# Altium PCB GANDHVEDH_Ammonia.PcbDoc (part 1 of 2)
Units mil, origin at the board's own origin, x right, y up, seen from the top; angles counter-clockwise.
Board outline 3700.79 x 3700.79 mil, 2 copper layers (Top Layer, Bottom Layer); 98 components, 57 nets, 314 pads, 1596 vias.
Unrouted connection lines stored in the file: 13.
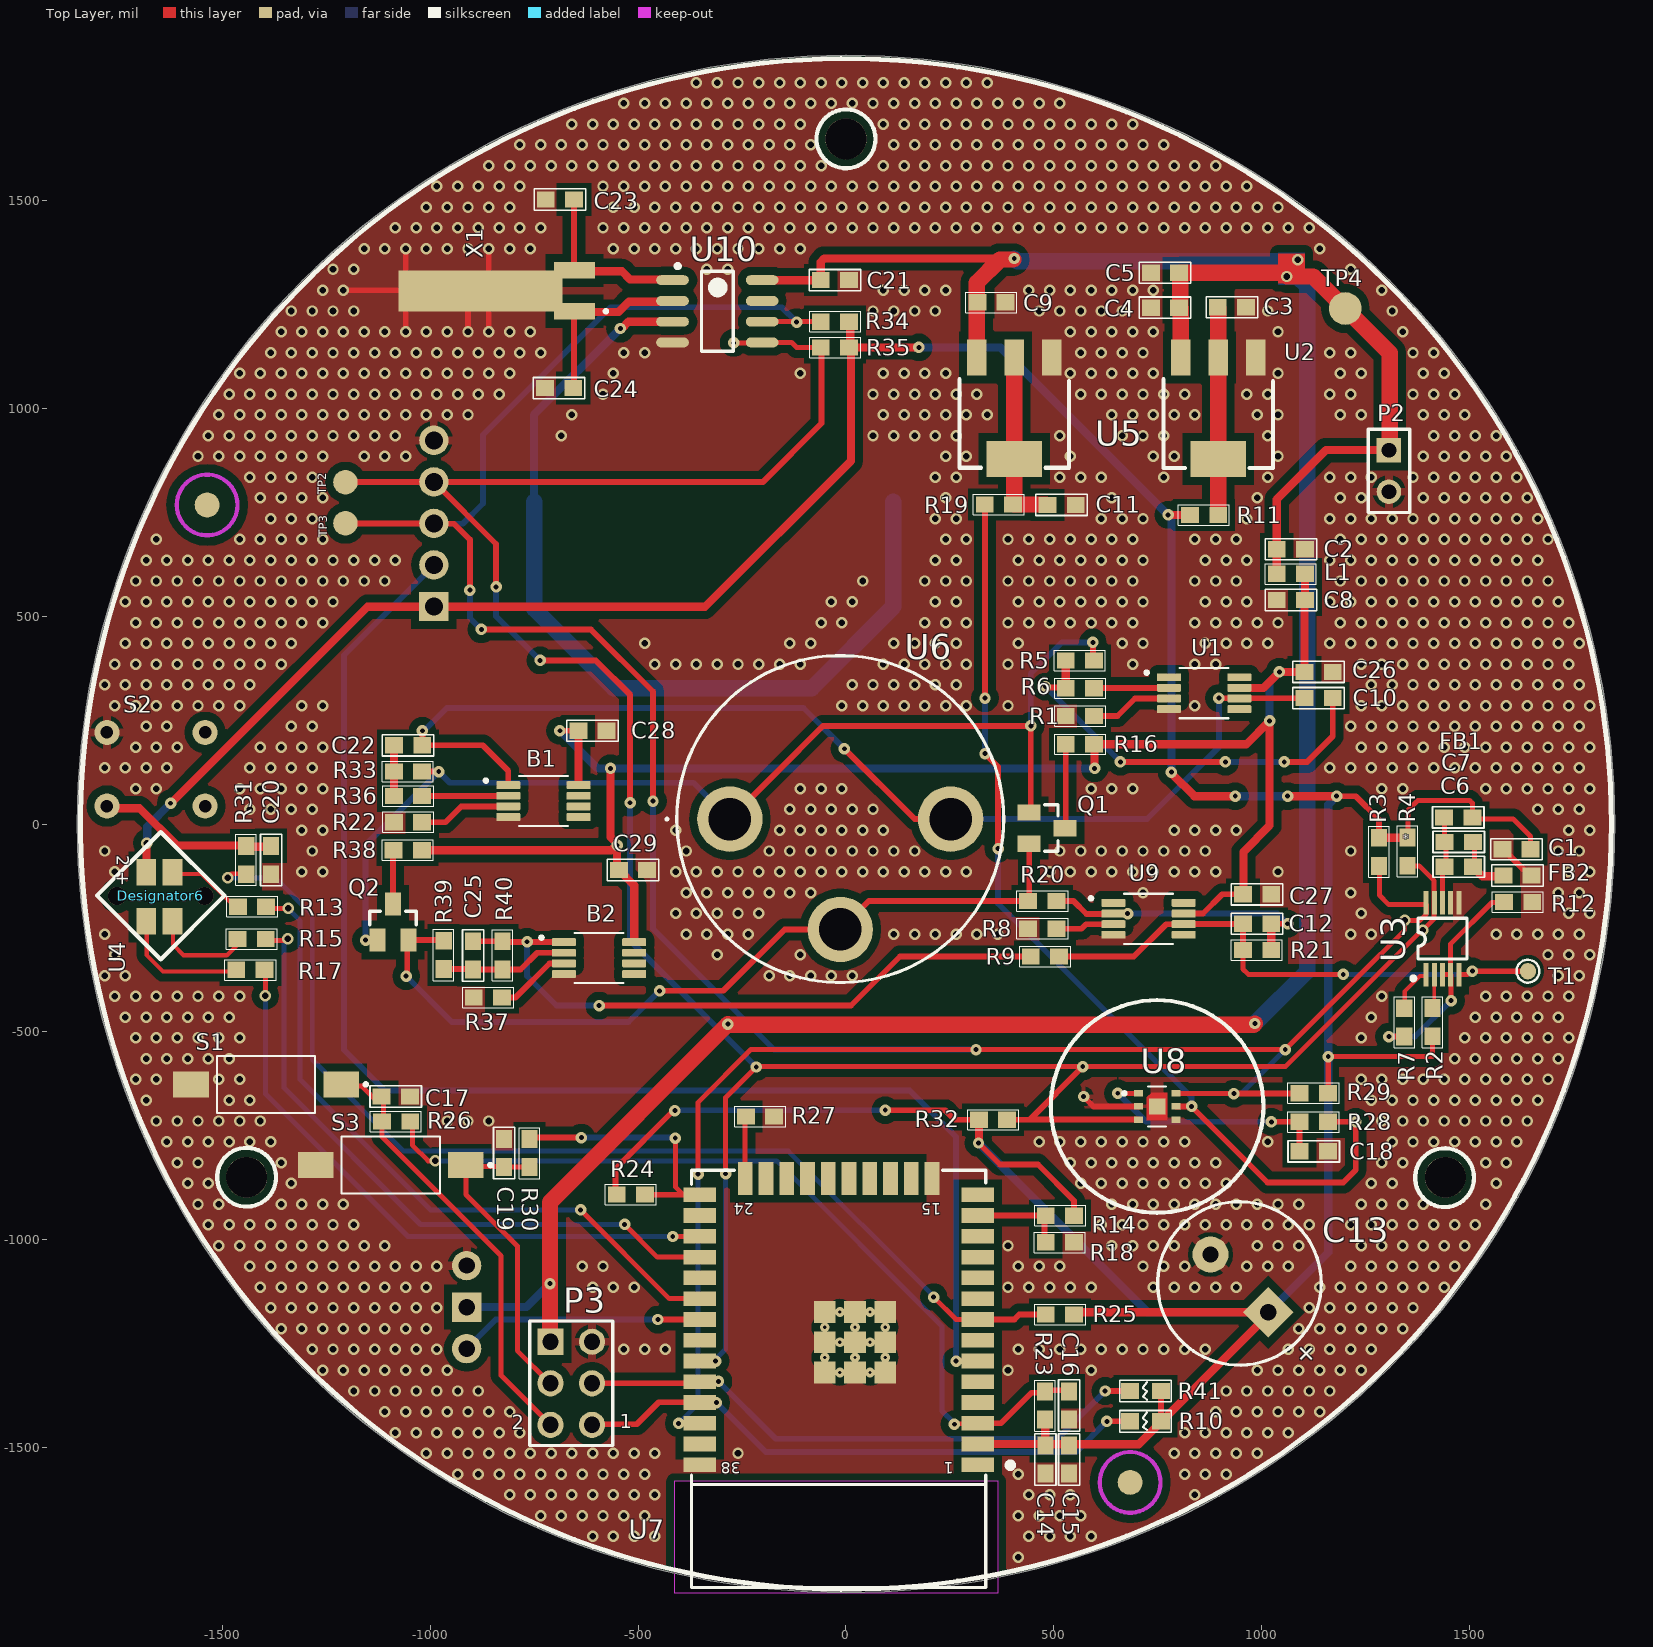
[diagram p0: Top Layer view]
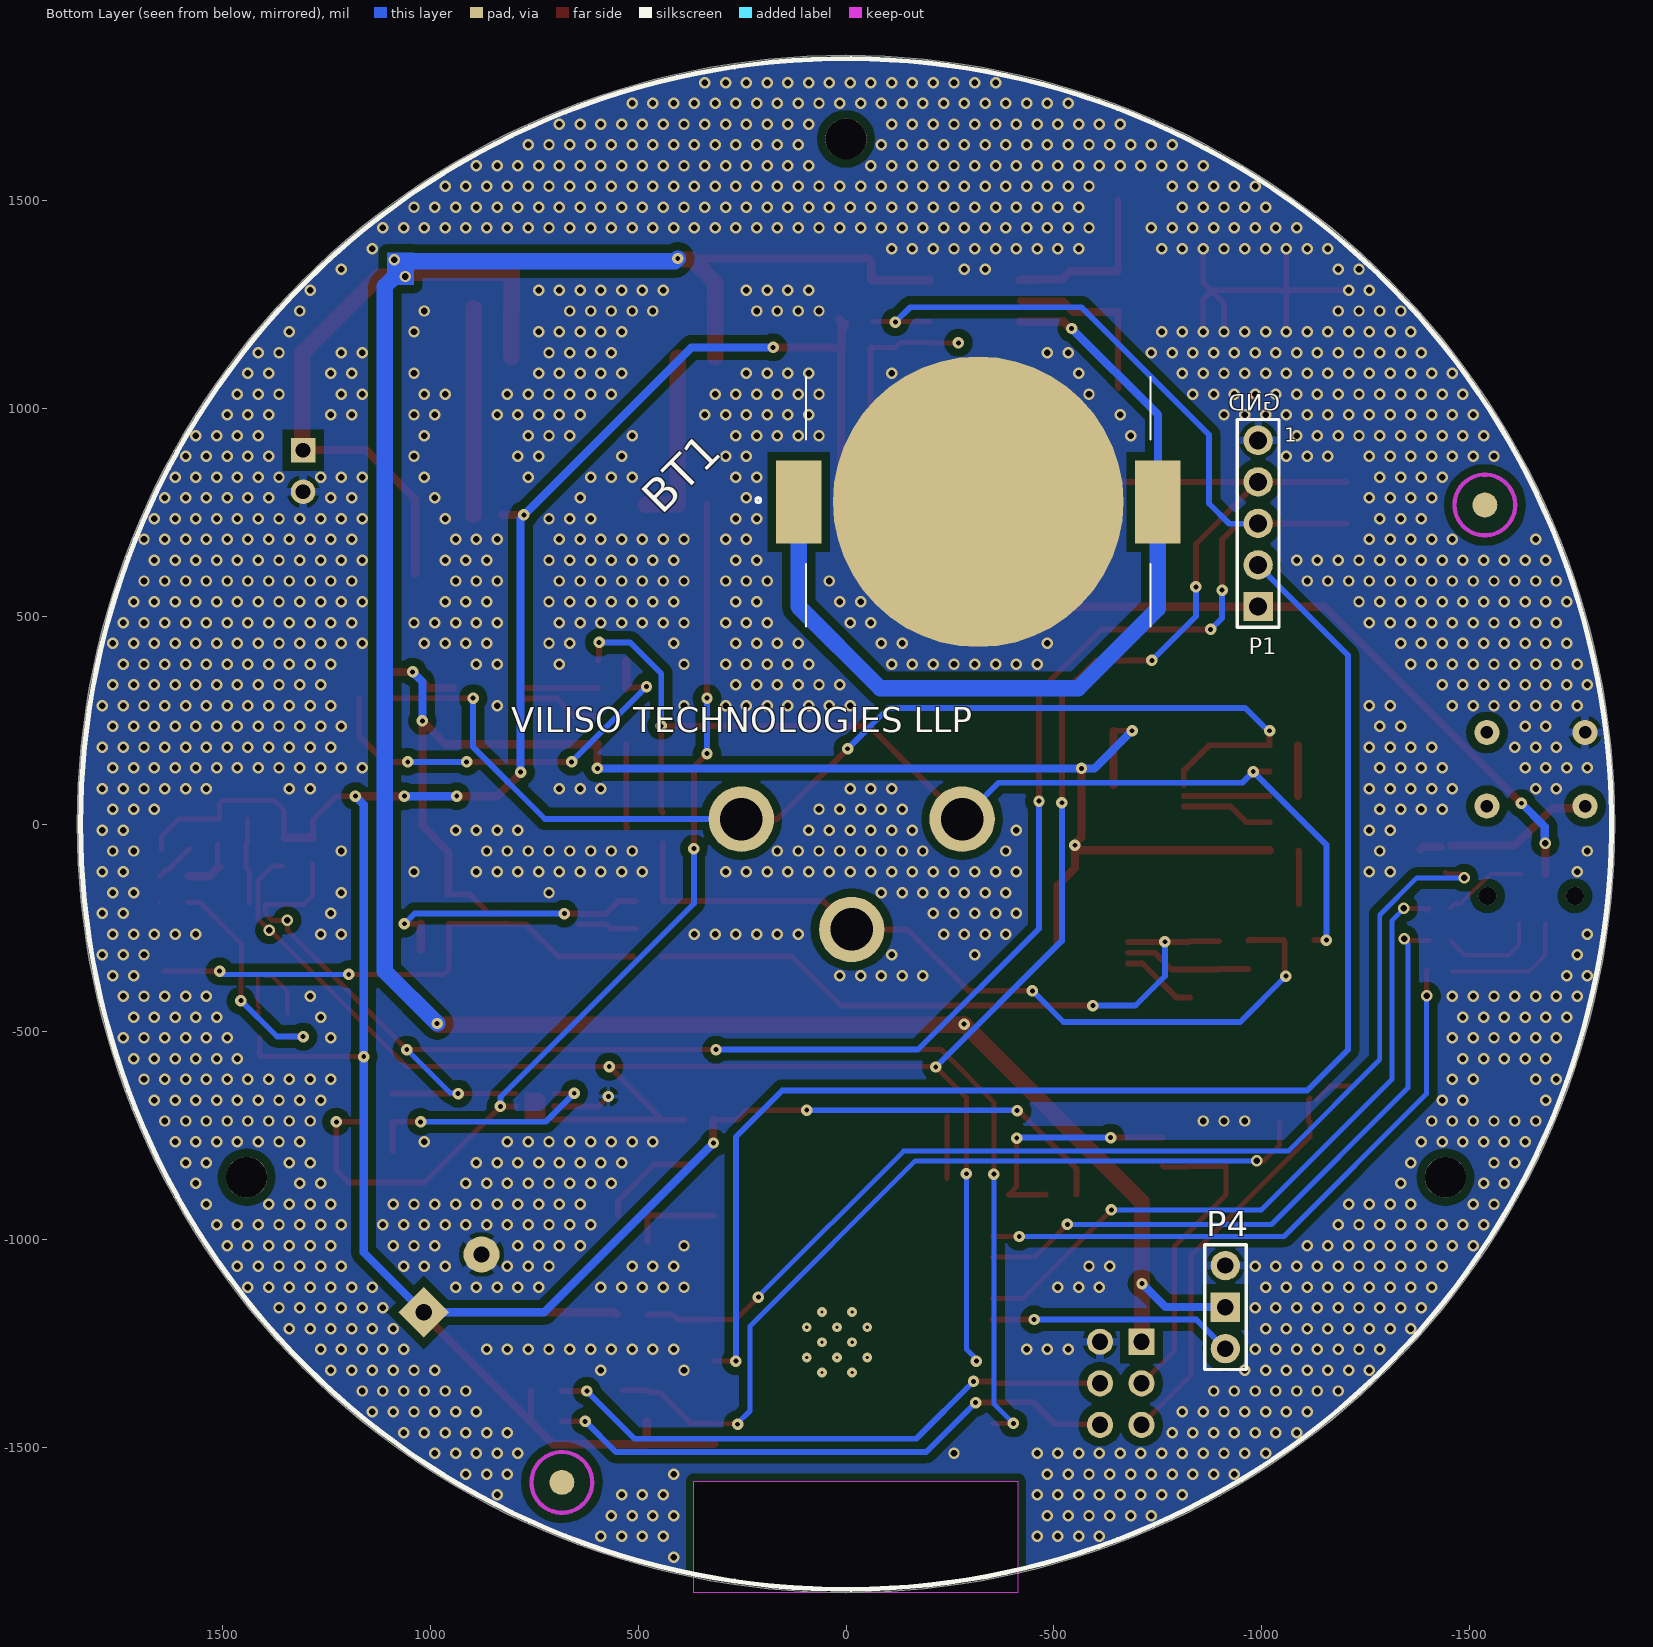
[diagram p1: Bottom Layer view, seen from below]

## Layer stack, top to bottom
Top Solder: solder mask 0.4, Solder Resist, Dk 3.5
Top Layer: signal copper 1.4
Dielectric 1: dielectric 12.6, FR-4, Dk 4.8
Bottom Layer: signal copper 1.4
Bottom Solder: solder mask 0.4, Solder Resist, Dk 3.5

## Board outline
-1850.39,0 ccw(c0,0) 0,-1850.39 ccw(c0,0) 1850.39,0 ccw(c0,0) 0,1850.39 ccw(c0,0)
cut-out: -413.39,-1582.68 -413.39,-1850.39 366.14,-1850.39 366.14,-1582.68

## Design rules (kind name [scope] priority, off if disabled: settings)
AssemblyTestpoint [All] p1: testpointundercomponent=FALSE minsize=40 maxsize=100 preferedsize=60 minholesize=0 maxholesize=40 preferedholesize=32.01 testpointgrid=0.98 usegrid=TRUE gridoriginx=2685 gridoriginy=2465 gridtolerance=0.01 allowsidetop=TRUE allowsidebottom=TRUE
BoardOutlineClearance [All] p1: gap=12 ignorepadtopadclearanceinfootprint=FALSE except(0: Arc-SplitContinuation Track-SplitContinuation SMDPad-SplitContinuation THPad-SplitContinuation Via-SplitContinuation Fill-SplitContinuation Poly-SplitContinuation Region-SplitContinuation Text-SplitContinuation)
Clearance Clearance_3 [InComponent('X2')] p1: gap=5.91 ignorepadtopadclearanceinfootprint=FALSE
Clearance Clearance_2 [InPolygon] p2: gap=19.68 ignorepadtopadclearanceinfootprint=FALSE
Clearance Clearance_1 [InComponent('U14')OR InComponent('U11')OR InComponent('U7')] p3: gap=3.94 ignorepadtopadclearanceinfootprint=FALSE
Clearance [All] p4: gap=3.94 ignorepadtopadclearanceinfootprint=FALSE
FabricationTestpoint [All] p1: side=3 testpointundercomponent=TRUE minsize=40 maxsize=100 preferedsize=60 minholesize=0 maxholesize=40 preferedholesize=32.01 testpointgrid=0.98 allowsidetop=TRUE allowsidebottom=TRUE usegrid=TRUE gridoriginx=2685 gridoriginy=2465 gridtolerance=0.01
HoleSize [All] p1: absolutevalues=TRUE maxlimit=100 minlimit=0.98 maxpercent=80.000 minpercent=20.000
LayerPairs [All] p1 off: enforce=TRUE
MinimumSolderMaskSliver [All] p1 off: minsoldermaskwidth=10
PolygonConnect [All] p1: thpad.connectstyle=Relief thpad.reliefconductorwidth=19.68 thpad.reliefentries=4 thpad.polygonreliefangle="90 Angle" thpad.airgapwidth=10 smdpad.connectstyle=Direct smdpad.reliefconductorwidth=10 smdpad.reliefentries=4 smdpad.polygonreliefangle="90 Angle" smdpad.airgapwidth=10 via.connectstyle=Relief via.reliefconductorwidth=10 via.reliefentries=4 via.polygonreliefangle="90 Angle" via.airgapwidth=10
RoutingVias [All] p1: holewidth=11.81 width=27.56 viastyle="Through Hole" minholewidth=3.94 minwidth=15.75 maxholewidth=11.81 maxwidth=27.56
SilkToSolderMaskClearance [IsPad] p1 off: minsilkscreentomaskgap=10 clearancetoexposedcopper=TRUE
SolderMaskExpansion [All] p1: expansion=4 istentingtop=FALSE
Width [All] p1: maxlimit=236.22 minlimit=7.87 preferedwidth=14
24 further rules are at their usual default settings.

## Components (designator, comment, footprint, x,y, rotation, side; value= is the part's Value field where it differs from the comment)
B1 "OPA2388IDGKT" SOP65P490X110-8N -728.35,55.12 r0 top
B2 "OPA2388IDGKT" SOP65P490X110-8N -594.49,-322.83 r0 top
BT1 "Battery" MPD_BK-912-TR -318.31,775.59 r180 bottom
C1 "1uf" C0603 1614.07,-60.9 r0 top
C2 "0.1µF" C0603 1070.87,661.42 r180 top
C3 "10uf" C0603 929.13,1244.09 r180 top
C4 "0.1uf" C0603 768,1243 r180 top
C5 "10uf" C0603 768,1327 r180 top
C6 "1uf" C0603 1475,-103 r0 top
C7 "10uf" C0603 1475,-43 r0 top
C8 "0.1µF" C0603 1070.87,539.37 r0 top
C9 "10µF" R0603 350.39,1255.91 r0 top
C10 "0.1uf" C0603 1137.8,303.15 r180 top
C11 "10µF" C0603 518.99,768.17 r0 top
C12 "0.1uf" C0603 989.62,-240.16 r180 top
C13 "470uf/16V" "C16, C49, C58" 947,-1106 r135 top
C14 "0.1uf" C0603 480,-1530 r90 top
C15 "0.1uf" C0603 537,-1530 r90 top
C16 "0.1uf" C0603 537,-1400 r90 top
C17 "1nF" C0603 -1084,-656 r180 top
C18 "0.1uf" C0603 1126.03,-788 r0 top
C19 "1nF" C0603 -823,-792 r270 top
C20 "1nF" C0603 -1384,-87 r90 top
C21 "1uf" C0603 -26.73,1309.29 r180 top
C22 "0.1uf" C0603 -1054.31,189.36 r0 top
C23 "0.1uf/DNP" C0603 -688.73,1503.29 r0 top
C24 "0.1uf/DNP" C0603 -690.73,1049.29 r0 top
C25 "0.1uf" C0603 -897.64,-316.37 r90 top
C26 "1uf" C0603 1137.8,366.14 r0 top
C27 "1uf" C0603 989.57,-169.29 r0 top
C28 "1uf" C0603 -610.24,224.41 r0 top
C29 "1uf" C0603 -512.81,-110.64 r0 top
Designator6 "light pipe" "PCBCOMPONENT_1 - DUPLICATE2" -1649.61,-173.23 r315 top
FB1 "FB 1uH" C0603 1474,16 r0 top
FB2 "FB 1uH" C0603 1616.5,-123.9 r0 top
L1 "1uH" "L3, L4, L5, L6, L7" 1070.87,602.36 r0 top
P1 "Header 5" J2 -992.13,723.62 r180 bottom
P2 "Header 2" HDR1X2 1307,900 r270 top
P3 "Header 3X2" "P5 - new" -661.42,-1346.46 r180 top
P4 "RGB LED Connector" P6 -913.39,-1162.99 r90 bottom
Q1 "MMBFJ176" SOT23 484.25,-9.84 r270 top
Q2 "MMBFJ176" SOT23 -1090.55,-236.22 r0 top
R1 "10K" R0603 562.99,259.84 r180 top
R2 "10K" R0603 1412,-477 r90 top
R3 "10K" R0603 1283,-67 r270 top
R4 "10K" R0603 1352,-66.41 r270 top
R5 "10K" R0603 562.99,393.7 r0 top
R6 "10K" R0603 562.99,326.77 r180 top
R7 "10K" R0603 1344,-477.41 r270 top
R8 "10E" R0603 472.44,-251.97 r180 top
R9 "0E" R0603 478.88,-318.9 r180 top
R10 "10K" R_0603_W 721,-1438 r180 top
R11 "0E" R0603 862.2,744.09 r0 top
R12 "0E" R0603 1618,-188 r0 top
R13 "1.69K" R0603 -1430,-199 r180 top
R14 "10K/ NTC/DNP" R0603 515,-943 r180 top
R15 "1.69K" R0603 -1431,-277 r180 top
R16 "1M" R0603 562.99,192.04 r180 top
R17 "1.69K" R0603 -1434,-351 r180 top
R18 "10K/DNP" R0603 515,-1007 r0 top
R19 "0E" R0603 367.99,769.17 r0 top
R20 "10E" R0603 472.44,-185.04 r180 top
R21 "10K" R0603 989.62,-303.15 r0 top
R22 "10K" R0603 -1054.31,4.32 r180 top
R23 "10K" R0603 479,-1400 r90 top
R24 "10K" R0603 -518,-892 r0 top
R25 "10K" R0603 515,-1181 r180 top
R26 "470E" R0603 -1083,-716 r0 top
R27 "10K" R0603 -207,-704 r180 top
R28 "0E" R0603 1126,-717 r0 top
R29 "10K" R0603 1126,-648 r0 top
R30 "470E" R0603 -762,-792 r90 top
R31 "470E" R0603 -1444,-87 r270 top
R32 "10K" R0603 354,-712 r180 top
R33 "10K" R0603 -1054.31,126.37 r0 top
R34 "10K/DNP" R0603 -26.73,1209.29 r180 top
R35 "10K/DNP" R0603 -26.73,1147.29 r180 top
R36 "10K" R0603 -1054.31,67.31 r180 top
R37 "10E" R0603 -862.2,-417.32 r180 top
R38 "1M" R0603 -1055.12,-62.99 r180 top
R39 "10E" R0603 -968.5,-314.96 r90 top
R40 "10K" R0603 -826.77,-316.39 r270 top
R41 "10K" R_0603_W 721,-1365 r180 top
S1 "SW-PB" *TE_FSMSM -1396,-627 r180 top locked
S2 "SW-DPST" "PCBComponent_1 - duplicate" -1661,131.76 r0 top locked
S3 "SW-PB" *TE_FSMSM -1096,-821 r180 top locked
T1 "TEST POINT" TP 1641.73,-354.33 r0 top
U1 "OPA380AIDGKT" SOP65P490X110-8N 862.2,314.96 r0 top
U2 "='Texas Instruments'PartNumber" "U1, U24              SOT-223" 896,1001.05 r180 top
U3 "ADS1115IDGSR-msop" "U19, U20" 1436,-276 r90 top locked
U4 "RGB_LED" WL-SFCW_1206 -1653,-175.25 r270 top
U5 "LM1117S-1.8" "U1, U24              SOT-223" 404.99,1001.17 r180 top
U6 "SGX-4NH3-100" SGX4NH3100 -279.53,11.81 r0 top
U7 "ESP_32" "U20             ESP 32" -17.76,-1198 r180 top locked
U8 "SGP30-D-R4" XCDR_SGP40-D-R4 749,-680 r0 top
U9 "OPA380AIDGKT" SOP65P490X110-8N 728.35,-228.35 r0 top
U10 "DS1307Z" "U14               SOIC-8N" -309.73,1234.29 r0 top
X1 "32.768kHz" XTAL_ECS-.327-12.5-13FLX-C -732.28,1283.46 r180 top

## Footprints (in the part's own frame and the unit in brackets; to place one, negate y for a bottom-side part, rotate by r counter-clockwise, add the part's x,y. Pads: shape width x height; smd on the part's side, far side on the other; paste and mask are expansions set on the pad)
*TE_FSMSM [mm]
  rect 2.19x1.6 smd: 1(-4.59,0) 2(4.59,0)
  silkscreen extent -6.2,-1.75 3,1.75, body extent -4.04,-1.78 3.96,1.82, height 2.4
"C16, C49, C58" [mm]
  rect 2.2x2.2 hole 1: 1(-2.5,0)
  round 2.2 hole 1: 2(2.5,0)
  silkscreen extent -5,-5 5,5
C0603 [mil]
  rect 43x39 smd: 1(-34.03,0) 2(34.03,0)
  silkscreen extent -62,-26 62,26, body extent -31,-16 31,16, height 12
HDR1X2 [mm] "Connector; Header; 2 Position"
  rect 1.5x1.5 hole 0.9: 1(0,0)
  round 1.5 hole 0.9: 2(2.54,0)
  silkscreen extent -1.27,-1.27 3.81,1.27
J2 [mm]
  round 1.8 hole 1.1: 1(0,5.08) 2(0,2.54) 3(0,0) 4(0,-2.54)
  rect 1.8x1.8 hole 1.1: 5(0,-5.08)
  silkscreen extent -1.27,-6.35 1.27,6.35, body extent -1.27,-6.35 1.27,6.35, height 9.07
"L3, L4, L5, L6, L7" [mil] "R0603"
  rect 43x39 smd: 1(-34,0) 2(34,0)
  silkscreen extent -61,-25 61,25, body extent -33,-16 33,16, height 22
MPD_BK-912-TR [mm]
  rect 2.79x5.08 smd: 1(-10.985,0) 1(10.985,0)
  round 17.78 smd: 2(0,0)
  silkscreen extent -13.59,-7.62 10.54,7.62, body extent -11.48,-7.67 11.38,7.74, height 4.3
"P5 - new" [mm]
  round 1.6 hole 1: 1(-1.27,2.54) 2(1.27,2.54) 3(-1.27,0) 4(1.27,0) 5(-1.27,-2.54)
  rect 1.6x1.6 hole 1: 6(1.27,-2.54)
  silkscreen extent -2.54,-3.81 2.54,3.81, body extent -2.54,-3.81 2.54,3.81, height 8.57
P6 [mm]
  round 1.8 hole 1: 1(-2.54,0) 3(2.54,0)
  rect 1.8x1.8 hole 1: 2(0,0)
  silkscreen extent -3.81,-1.27 3.81,1.27, body extent -3.78,-1.22 3.84,1.32, height 9.07
"PCBComponent_1 - duplicate" [mil]
  round 60 hole 30: 1(118.11,-88.58) 2(-118.11,-88.58) 3(118.11,88.58) 4(-118.11,88.58)
  body extent -150,-121 152,115, height 195
"PCBCOMPONENT_1 - DUPLICATE2" [mm]
  round 1.1 hole 1.1: 1(1.89,1.89) 2(-1.89,-1.89)
  silkscreen extent -2.77,-2.74 2.74,2.77
R0603 [mil] "R0603"
  rect 43x39 smd: 1(-34,0) 2(34,0)
  silkscreen extent -62,-25 61,25, body extent -33,-16 33,16, height 22
R_0603_W [mil] "Chip Resistor, 2-Leads, Body 1.60x0.80mm, IPC Medium Density"
  rect 43x39 smd: 1(-37,0) 2(37,0)
  silkscreen extent -62,-26 62,26, body extent -30,-15 32,16, height 18
SGX4NH3100 [mm]
  round 4 hole 2.6: 1(0,0) 2(6.75,-6.75) 3(13.5,0)
  silkscreen extent -3.9,-10 16.75,10
SOP65P490X110-8N [mm]
  rrect25% 1.47x0.48 smd: 1(-2.15,0.975) 2(-2.15,0.325) 3(-2.15,-0.325) 4(-2.15,-0.975) 5(2.15,-0.975) 6(2.15,-0.325) 7(2.15,0.325) 8(2.15,0.975)
  silkscreen extent -3.62,-1.54 1.5,1.54
SOT23 [mm]
  rect 1x1.4 smd: 1(-0.95,-1.1) 2(0.95,-1.1) 3(0,1.1)
  silkscreen extent -1.42,-0.15 1.42,0.66, body extent -1.45,-1.2 1.45,1.2, height 1.11
TP [mm]
  round 1 smd paste-1 mask+0.102: 1(0,0)
  silkscreen extent -0.7,-0.7 0.7,0.7
"U1, U24              SOT-223" [mm]
  rect 1.2x2.2 smd: 1(-2.3,-3.1) 2(0,-3.1) 3(2.3,-3.1)
  rect 3.4x2.2 smd: 4(0,3.1)
  silkscreen extent -3.35,-1.77 3.35,3.65, body extent -3.26,-3.47 3.24,3.49, height 1.9
"U14               SOIC-8N" [mm]
  oval 2x0.6 smd: 1(-2.74,1.905) 2(-2.74,0.635) 3(-2.74,-0.635) 4(-2.74,-1.905) 5(2.74,-1.905) 6(2.74,-0.635) 7(2.74,0.635) 8(2.74,1.905)
  silkscreen extent -2.55,-2.44 0.98,2.89, body extent -2.99,-2.45 3,2.45, height 1.7
"U19, U20" [mm]
  rect 1.45x0.3 smd mask+0.08: 1(-2.2,1) 2(-2.2,0.5) 3(-2.2,0) 4(-2.2,-0.5) 5(-2.2,-1) 6(2.2,-1) 7(2.2,-0.5) 8(2.2,0) 9(2.2,0.5) 10(2.2,1)
  silkscreen extent -2.55,-1.5 1.25,1.9
"U20             ESP 32" [mm]
  rect 2x0.9 smd: 1(-8.5,8.755) 2(-8.5,7.485) 3(-8.5,6.215) 4(-8.5,4.945) 5(-8.5,3.675) 6(-8.5,2.405) 7(-8.5,1.135) 8(-8.5,-0.135) 9(-8.5,-1.405) 10(-8.5,-2.675) 11(-8.5,-3.945) 12(-8.5,-5.215) 13(-8.5,-6.485) 14(-8.5,-7.755) 25(8.5,-7.755) 26(8.5,-6.485) 27(8.5,-5.215) 28(8.5,-3.945) 29(8.5,-2.675) 30(8.5,-1.405) 31(8.5,-0.135) 32(8.5,1.135) 33(8.5,2.405) 34(8.5,3.675) 35(8.5,4.945) 36(8.5,6.215) 37(8.5,7.485) 38(8.5,8.755)
  rect 0.9x2 smd: 15(-5.715,-8.755) 16(-4.445,-8.755) 17(-3.175,-8.755) 18(-1.905,-8.755) 19(-0.635,-8.755) 20(0.635,-8.755) 21(1.905,-8.755) 22(3.175,-8.755) 23(4.445,-8.755) 24(5.715,-8.755)
  rect 1.33x1.33 smd: 39(-2.85,3.115) 39(-2.85,-0.585) 39(-2.85,1.265) 39(-1,3.115) 39(-1,1.265) 39(-1,-0.585) 39(0.85,3.115) 39(0.85,1.265) 39(0.85,-0.585)
  silkscreen extent -10.6,-9.26 9,16.26, body extent -9.06,-9.29 9.01,16.25, height 3.2
WL-SFCW_1206 [mm] "SMT Full-color Chip LED Waterclear, body 3.2x1.6mm"
  rect 1.6x1.2 smd: 1(-1.5,0.8) 2(-1.5,-0.8) 3(1.5,-0.8) 4(1.5,0.8)
  body extent -1.6,-0.8 1.6,0.8, height 0.7
XCDR_SGP40-D-R4 [mm]
  rect 0.55x0.4 smd mask+0.05: 1(-1.15,0.8) 2(-1.15,0) 3(-1.15,-0.8) 4(1.15,-0.8) 5(1.15,0) 6(1.15,0.8)
  rect 1x1 smd paste-1 mask+0: 7(0,0)
  Top Layer region: 0.625,-0.85 -0.625,-0.85 -0.625,0.55 -0.325,0.85 0.625,0.85
  silkscreen extent -2.1,-1.22 0.56,1.22, body extent -1.22,-1.22 1.22,1.22, height 0.95
XTAL_ECS-.327-12.5-13FLX-C [mm]
  rect 2.5x1 smd: 1(-2,-1.25) 2(-2,1.25)
  rect 10x2.5 smd paste-4: 3(3.75,0)
  silkscreen extent -4.02,1.15 -3.82,1.35, body extent -2.57,-1.41 6.68,1.41, height 2.1

## Part data
B1 B2: "10MHz, CMOS, Zero-Drift, Zero-Crossover, True RRIO Precision Operational Amplifier", Manufacturer_Name="Texas Instruments", Mouser Part Number=595-OPA2388IDGKT, Arrow Part Number=OPA2388IDGKT, Arrow Price/Stock=https://www.arrow.com/en/products/opa2388idgkt/texas-instruments?region=nac, Datasheet Link=http://www.ti.com/general/docs/suppproductinfo.tsp?distId=10&gotoUrl=http%3A%2F%2Fwww.ti.com%2Flit%2Fgpn%2Fopa2388, Geometry.Height=1.1mm, Manufacturer_Part_Number=OPA2388IDGKT, Mouser Price/Stock=https://www.mouser.co.uk/ProductDetail/Texas-Instruments/OPA2388IDGKT?qs=w%2Fv1CP2dgqqFmz4GVbS77Q%3D%3D
BT1: "Multicell Battery", LatestRevisionDate=17-Jul-2002, LatestRevisionNote="Re-released for DXP Platform.", PackageDescription="Battery; 2 Leads", PackageReference=BAT-2, Published=24-Mar-1999, Publisher="Altium Limited"
C1: library part CAP_C_0.1µF/16V, "CAP CER SMD 0.1µF/16V", Capacitance=1µF, MANUFACTURER="Murata Electronics North America", Manufacturer Part Number=GRM155R61H104KE19D, Operating Temperature="-55°C ~ 85°C", Package / Case="0402 (1005 Metric)", Ratings=-, Supplier Part Number 1=490-11917-1-ND, Temperature Coefficient=X5R, Tolerance=±10%, Voltage - Rated=16V, Applications="General Purpose", Category=Capacitors, ComponentLink1Description=http://www.murata.com/~/media/webrenewal/support/library/catalog/products/capacitor/mlcc/c02e.ashx, ComponentLink1URL=http://www.murata.com/~/media/webrenewal/support/library/catalog/products/capacitor/mlcc/c02e.ashx, Features=-, Height - Seated (Max)=-, Lead Spacing=-, Lead Style=-, Mounting Type="Surface Mount, MLCC", Packaging="Cut Tape (CT)", Part Status=Active, Pricing 1="1=0.1, 10=0.062, 25=0.0456, 50=0.034, 100=0.0278, 250=0.02328, 500=0.01988, 1000=0.01562, 5000=0.01307 (USD)", ROHS="RoHS Compliant", Size / Dimension="0.039\" L x 0.020\" W (1.00mm x 0.50mm)", Stock 1=958509, Supplier 1=Digi-Key, Thickness (Max)="0.022\" (0.55mm)"
C2 C8 C17 C19 C20: library part CAP_C_0.1µF/16V, "CAP CER SMD 0.1µF/16V", MANUFACTURER="Murata Electronics North America", Manufacturer Part Number=GRM155R61H104KE19D, Operating Temperature="-55°C ~ 85°C", Package / Case="0402 (1005 Metric)", Ratings=-, Supplier Part Number 1=490-11917-1-ND, Temperature Coefficient=X5R, Tolerance=±10%, Voltage - Rated=16V, Applications="General Purpose", Category=Capacitors, ComponentLink1Description=http://www.murata.com/~/media/webrenewal/support/library/catalog/products/capacitor/mlcc/c02e.ashx, ComponentLink1URL=http://www.murata.com/~/media/webrenewal/support/library/catalog/products/capacitor/mlcc/c02e.ashx, Features=-, Height - Seated (Max)=-, Lead Spacing=-, Lead Style=-, Mounting Type="Surface Mount, MLCC", Packaging="Cut Tape (CT)", Part Status=Active, Pricing 1="1=0.1, 10=0.062, 25=0.0456, 50=0.034, 100=0.0278, 250=0.02328, 500=0.01988, 1000=0.01562, 5000=0.01307 (USD)", ROHS="RoHS Compliant", Size / Dimension="0.039\" L x 0.020\" W (1.00mm x 0.50mm)", Stock 1=958509, Supplier 1=Digi-Key, Thickness (Max)="0.022\" (0.55mm)"
  C2 C8: Capacitance=0.1µF
  C17 C19 C20: Capacitance=1nF
C3 C5 C7: library part CAP_C_10µF/35V, "CAP CER SMD 10µF/35V", Capacitance=10µF, MANUFACTURER="Taiyo Yuden", Manufacturer Part Number=GMK316AB7106KL-TR, Operating Temperature="-55°C ~ 125°C", Package / Case="1206 (3216 Metric)", Ratings=-, Supplier Part Number 1=587-3007-1-ND, Temperature Coefficient=X7R, Tolerance=±10%, Voltage - Rated=35V, Applications="General Purpose", Category=Capacitors, ComponentLink1Description=http://www.yuden.co.jp/productdata/catalog/en/mlcc06_e.pdf, ComponentLink1URL=http://www.yuden.co.jp/productdata/catalog/en/mlcc06_e.pdf, Features=-, Height - Seated (Max)=-, Lead Spacing=-, Lead Style=-, Mounting Type="Surface Mount, MLCC", Packaging="Cut Tape (CT)", Part Status=Active, Pricing 1="1=0.51, 10=0.362, 25=0.3092, 50=0.274, 100=0.2387, 250=0.20328, 500=0.17678, 1000=0.15026 (USD)", ROHS="RoHS Compliant", Size / Dimension="0.126\" L x 0.063\" W (3.20mm x 1.60mm)", Stock 1=533940, Supplier 1=Digi-Key, Thickness (Max)="0.071\" (1.80mm)"
C4 C23 C24: library part CAP_C_0.1µF/50V, "CAP CER SMD 0.1µF/50V", Capacitance=0.1µF, MANUFACTURER=Yageo, Manufacturer Part Number=CC0805ZRY5V9BB104, Operating Temperature="-30°C ~ 85°C", Package / Case="0805 (2012 Metric)", Ratings=-, Supplier Part Number 1=311-1361-1-ND, Temperature Coefficient="Y5V (F)", Tolerance="-20%, +80%", Voltage - Rated=50V, Applications="General Purpose", Category=Capacitors, ComponentLink1Description=http://www.yageo.com/documents/recent/UPY-GPHC_Y5V_6.3V-to-50V_8.pdf, ComponentLink1URL=http://www.yageo.com/documents/recent/UPY-GPHC_Y5V_6.3V-to-50V_8.pdf, Failure Rate=-, Features=-, Height - Seated (Max)=-, Lead Spacing=-, Lead Style=-, Mounting Type="Surface Mount, MLCC", Packaging="Cut Tape (CT)", Part Status=Active, Pricing 1="1=0.1, 10=0.036, 25=0.0264, 50=0.0198, 100=0.0162, 250=0.01352, 500=0.01156, 1000=0.00908 (USD)", ROHS="RoHS Compliant", Size / Dimension="0.079\" L x 0.049\" W (2.00mm x 1.25mm)", Stock 1=934185, Supplier 1=Digi-Key, Thickness (Max)="0.024\" (0.60mm)"
C6 C10 C12 C18 C21 C22 C25 C26 C27 C28 C29: library part CAP_C_0.1µF/50V, "CAP CER SMD 0.1µF/50V", Capacitance=1µF, MANUFACTURER=Yageo, Manufacturer Part Number=CC0805ZRY5V9BB104, Operating Temperature="-30°C ~ 85°C", Package / Case="0805 (2012 Metric)", Ratings=-, Supplier Part Number 1=311-1361-1-ND, Temperature Coefficient="Y5V (F)", Tolerance="-20%, +80%", Voltage - Rated=50V, Applications="General Purpose", Category=Capacitors, ComponentLink1Description=http://www.yageo.com/documents/recent/UPY-GPHC_Y5V_6.3V-to-50V_8.pdf, ComponentLink1URL=http://www.yageo.com/documents/recent/UPY-GPHC_Y5V_6.3V-to-50V_8.pdf, Failure Rate=-, Features=-, Height - Seated (Max)=-, Lead Spacing=-, Lead Style=-, Mounting Type="Surface Mount, MLCC", Packaging="Cut Tape (CT)", Part Status=Active, Pricing 1="1=0.1, 10=0.036, 25=0.0264, 50=0.0198, 100=0.0162, 250=0.01352, 500=0.01156, 1000=0.00908 (USD)", ROHS="RoHS Compliant", Size / Dimension="0.079\" L x 0.049\" W (2.00mm x 1.25mm)", Stock 1=934185, Supplier 1=Digi-Key, Thickness (Max)="0.024\" (0.60mm)"
C9 C11: library part CAP_C_10µF/35V, "CAP CER SMD 10µF/35V", MANUFACTURER="Taiyo Yuden", Manufacturer Part Number=GMK316AB7106KL-TR, Operating Temperature="-55°C ~ 125°C", Package / Case="1206 (3216 Metric)", Ratings=-, Supplier Part Number 1=587-3007-1-ND, Temperature Coefficient=X7R, Tolerance=±10%, Voltage - Rated=35V, Applications="General Purpose", Capacitance=10µF, Category=Capacitors, ComponentLink1Description=http://www.yuden.co.jp/productdata/catalog/en/mlcc06_e.pdf, ComponentLink1URL=http://www.yuden.co.jp/productdata/catalog/en/mlcc06_e.pdf, Features=-, Height - Seated (Max)=-, Lead Spacing=-, Lead Style=-, Mounting Type="Surface Mount, MLCC", Packaging="Cut Tape (CT)", Part Status=Active, Pricing 1="1=0.51, 10=0.362, 25=0.3092, 50=0.274, 100=0.2387, 250=0.20328, 500=0.17678, 1000=0.15026 (USD)", ROHS="RoHS Compliant", Size / Dimension="0.126\" L x 0.063\" W (3.20mm x 1.60mm)", Stock 1=533940, Supplier 1=Digi-Key, Thickness (Max)="0.071\" (1.80mm)"
C13: library part CAP, "CAP ALUM 470UF 20% 50V RADIAL", Part Number=871-B41896E6477M000
C14 C16: library part CAP_C_0.1µF/16V, "CAP CER SMD 0.1µF/16V", Capacitance=0.1µF, MANUFACTURER="Murata Electronics North America", Manufacturer Part Number=GRM155R61H104KE19D, Operating Temperature="-55°C ~ 85°C", Package / Case="0402 (1005 Metric)", Ratings=-, Supplier Part Number 1=490-11917-1-ND, Temperature Coefficient=X5R, Tolerance=±10%, Voltage - Rated=16V, Applications="General Purpose", Category=Capacitors, ComponentLink1Description=http://www.murata.com/~/media/webrenewal/support/library/catalog/products/capacitor/mlcc/c02e.ashx, ComponentLink1URL=http://www.murata.com/~/media/webrenewal/support/library/catalog/products/capacitor/mlcc/c02e.ashx, Features=-, Height - Seated (Max)=-, Lead Spacing=-, Lead Style=-, Mounting Type="Surface Mount, MLCC", Packaging="Cut Tape (CT)", Part Status=Active, Pricing 1="1=0.1, 10=0.062, 25=0.0456, 50=0.034, 100=0.0278, 250=0.02328, 500=0.01988, 1000=0.01562, 5000=0.01307 (USD)", ROHS="RoHS Compliant", Size / Dimension="0.039\" L x 0.020\" W (1.00mm x 0.50mm)", Stock 1=958509, Supplier 1=Digi-Key, Thickness (Max)="0.022\" (0.55mm)"
C15: library part CAP_C_10µF/10V, "CAP CER SMD 10µF/10V", Capacitance=10µF, MANUFACTURER=Yageo, Manufacturer Part Number=CC0805ZKY5V6BB106, Operating Temperature="-30°C ~ 85°C", Package / Case="0805 (2012 Metric)", Ratings=-, Supplier Part Number 1=311-1355-1-ND, Temperature Coefficient="Y5V (F)", Tolerance="-20%, +80%", Voltage - Rated=10V, Applications="General Purpose", Category=Capacitors, ComponentLink1Description=http://www.yageo.com/documents/recent/UPY-GPHC_Y5V_6.3V-to-50V_8.pdf, ComponentLink1URL=http://www.yageo.com/documents/recent/UPY-GPHC_Y5V_6.3V-to-50V_8.pdf, Failure Rate=-, Features=-, Height - Seated (Max)=-, Lead Spacing=-, Lead Style=-, Mounting Type="Surface Mount, MLCC", Packaging="Cut Tape (CT)", Part Status=Active, Pricing 1="1=0.18, 10=0.131, 25=0.0956, 50=0.0742, 100=0.0615, 250=0.05088, 500=0.04312, 1000=0.03569 (USD)", ROHS="RoHS Compliant", Size / Dimension="0.079\" L x 0.049\" W (2.00mm x 1.25mm)", Stock 1=595702, Supplier 1=Digi-Key, Thickness (Max)="0.049\" (1.25mm)"
FB1 FB2: library part INDUCTOR, "FILTER CHIP 120 OHM 3A 0603", Distributor Part Number=MMZ2012Y152B, PACKAGE=0603, Manufacturer Part Number=MMZ2012Y152B, Part Number=MMZ2012Y152B, Type=Ferrite
L1: library part INDUCTOR, "FERRITE BEAD 120 OHM 0603 1LN", Part Number=490-3996-1-ND, Supplier Part Number 1=BLM18SG121TN1D, Supplier 1=Arrow
P1: "Header, 5-Pin", LatestRevisionDate=17-Jul-2002, LatestRevisionNote="Re-released for DXP Platform.", Publisher="Altium Limited"
P2: "Header, 2-Pin", LatestRevisionDate=17-Jul-2002, LatestRevisionNote="Re-released for DXP Platform.", Publisher="Altium Limited"
P3: "Header, 3-Pin, Dual row", LatestRevisionDate=17-Jul-2002, LatestRevisionNote="Re-released for DXP Platform.", Publisher="Altium Limited"
P4: library part "Header 3", "Header, 3-Pin", LatestRevisionDate=17-Jul-2002, LatestRevisionNote="Re-released for DXP Platform.", Publisher="Altium Limited"
Q1 Q2: "JFET P-Channel 30V 225mW Surface Mount SOT-23-3", PACKAGE="SOT-23-3 ON Semiconductor", Availability=Good, Check_prices=https://www.snapeda.com/parts/MMBFJ176/ON%20Semiconductor/view-part/2239418/?ref=eda, MF="ON Semiconductor", MP=MMBFJ176, Price=None, Purchase-URL=https://pricing.snapeda.com/search/part/MMBFJ176/?ref=eda, SnapEDA_Link=https://www.snapeda.com/parts/MMBFJ176/ON%20Semiconductor/view-part/2239418/?ref=snap
R1 R5 R6 R8 R9 R12 R16 R20 R21 R22 R33 R36 R37 R38 R39 R40: library part R, PACKAGE=0603, Type=Resistor
R2 R3 R4 R7: library part R, "RES SMD 4.7K OHM 1% 1/16W 0603", Distributor Part Number=1276-3466-2-ND, MANUFACTURER=Samsung, PACKAGE=0603, Part Number=311-10KGRTR-ND, Rating=1/16W, Tolerance=1%, Distributor=Digikey, Manufacturer Part Number=1276-3466-2-ND, Type=Resistor
R10 R13 R15 R17 R18 R23 R24 R25 R27 R28 R29 R32 R34 R35 R41: library part R, "RES SMD 4.7K OHM 1% 1/16W 0603", PACKAGE=0603, Part Number=311-10KGRTR-ND, Type=Resistor
R11: library part R, "RES SMD 40.2K OHM 0.1% 1/5W 0603", PACKAGE=0603, Part Number=P20154TR-ND, Type=Resistor
R14: library part R, "THERMISTOR NTC 10KOHM 3380K 0603", PACKAGE=0603, Part Number=490-16279-2-ND, Type=Resistor
R19 R26 R30 R31: library part R, "RES SMD 470 OHM 1% 1/10W 0603", PACKAGE=0603, Part Number=311-470HRCT-ND, Type=Resistor
S1 S3: "Switch", LatestRevisionDate=17-Jul-2002, LatestRevisionNote="Re-released for DXP Platform.", PackageDescription="Switch; 2 Leads", PackageReference=SPST-2, Published=24-Mar-1999, Publisher="Altium Limited"
S2: "Double-Pole, Single-Throw Switch", LatestRevisionDate=17-Jul-2002, LatestRevisionNote="Re-released for DXP Platform.", PackageDescription="Switch; 4 Leads", PackageReference=DPST-4, Published=24-Mar-1999, Publisher="Altium Limited"
T1: library part Test_P
U1 U9: PACKAGE=None, Availability=Unavailable, MP=OPA380AIDGKT, Price=None
U2: library part TLV70033DDCT, "3.3V LDO", Current - Limit (Min)=220mA, Current - Output=200mA, MANUFACTURER="Texas Instruments", Manufacturer Part Number=LM1117, Operating Temperature="-40°C ~ 125°C", Package / Case="SOT-23-5 Thin, TSOT-23-5", Supplier Device Package=SOT-23-5, Supplier Part Number 1=296-25276-1-ND, Voltage - Dropout (Typical)=-, Voltage - Input="Up to 5.5V", Voltage - Output=3.3V, Category="Integrated Circuits (ICs)", ComponentLink1Description=http://www.ti.com/lit/ds/slvsa00e/slvsa00e.pdf, ComponentLink1URL=http://www.ti.com/lit/ds/slvsa00e/slvsa00e.pdf, Mounting Type="Surface Mount", Packaging="Cut Tape (CT)", Part Status=Active, Pricing 1="1=0.53, 10=0.452, 100=0.3374 (USD)", Regulator Topology="Positive Fixed", ROHS="RoHS Compliant", Stock 1=5021, Supplier 1=Digi-Key
U3: library part ADS1115, "IC ADC 16BIT SIGMA-DELTA 10VSSOP", Part Number=595-ADS1115IDGST
U4: library part RGB_LED_PTH_0, Part Number=754-1492-ND
U5: library part TLV70033DDCT, "3.3V LDO", Current - Limit (Min)=220mA, Current - Output=200mA, MANUFACTURER="Texas Instruments", Manufacturer Part Number=LM1117, Operating Temperature="-40°C ~ 125°C", Package / Case="SOT-23-5 Thin, TSOT-23-5", Supplier Device Package=SOT-23-5, Supplier Part Number 1=LM1117IMP-3.3/NOPBCT-ND, Voltage - Dropout (Typical)=-, Voltage - Input="Up to 5.5V", Voltage - Output=3.3V, Category="Integrated Circuits (ICs)", ComponentLink1Description=http://www.ti.com/lit/ds/slvsa00e/slvsa00e.pdf, ComponentLink1URL=http://www.ti.com/lit/ds/slvsa00e/slvsa00e.pdf, Mounting Type="Surface Mount", Packaging="Cut Tape (CT)", Part Status=Active, Pricing 1="1=0.53, 10=0.452, 100=0.3374 (USD)", Regulator Topology="Positive Fixed", ROHS="RoHS Compliant", Stock 1=5021, Supplier 1=Digi-Key
U6: "Air Quality Sensors 4 Series Ammonia sensor - 100ppm", Manufacturer_Name=Amphenol, Mouser Part Number=523-SGX-4NH3-100, Datasheet Link=https://sgx.cdistore.com/datasheets/sgx/ds-0329-sgx-4nh3-100-datasheet.pdf, Geometry.Height=16.65mm, Manufacturer_Part_Number=SGX-4NH3-100, Mouser Price/Stock=https://www.mouser.co.uk/ProductDetail/Amphenol-SGX-Sensortech/SGX-4NH3-100?qs=GedFDFLaBXEqY8NJ5Ztffw%3D%3D
U7: library part ESP32_SMD_1, "WIFI MODULE 128MBITS SPI FLASH", Part Number=356-ES32WROOM32D16MB
U8: library part SGP40-D-R4, "Integrated Circuit", Manufacturer_Name=Sensirion, Mouser Part Number=403-SGP40-D-R4, Arrow Part Number=SGP40-D-R4, Arrow Price/Stock=https://www.arrow.com/en/products/sgp40-d-r4/sensirion-ag?region=europe, Datasheet Link=https://www.mouser.com/datasheet/2/682/Sensirion_Gas_Sensors_SGP40_Datasheet-1888696.pdf, Height=0.95mm, Manufacturer_Part_Number=SGP40-D-R4, Mouser Price/Stock=https://www.mouser.co.uk/ProductDetail/Sensirion/SGP40-D-R4?qs=yqaQSyyJnNgaRqiZfsbS1Q%3D%3D
U10: library part MP1584_SOIC_0, "IC REG BUCK ADJUSTABLE 3A 8SOIC", Part Number=1589-1533-1-ND
X1: library part XTAL_2-pin, "XTAL SMD 3215, 32.768kHz, Cl=9pF, Total Tol: ±50ppm", Part Number=XTAL_SMD3215_32.768kHz_9pF_General, Artikkelnr Noca=N.A., Artikkelnr Simpro=N.A., Footprint Doc=XTAL_3215, LatestRevisionDate=2016-08-19, Note="XTAL SMD 32.768kHz", Pin Count=2, Published=2016-08-19, Publisher="Nordic Semiconductor"

## Free pads (board coordinates)
  round 98.43 hole 98.43 unplated: 20(-1442.91,-850.39) 20(0,1649.33) 20(1442.91,-850.39)
  round 59.06 smd: 22(-1205,724) 22(-1205,823)
  round 78.74 smd: 22(1202,1241)
  round 60 smd: 24(-1538,768) 24(684,-1585)
  round 60 smd far side: 24(-1538,768) 24(684,-1585)

## Via types
v1: diameter 27.56, hole 15.75, Top Layer to Bottom Layer, tented both sides, 1503 vias
v2: diameter 27.56, hole 11.81, Top Layer to Bottom Layer, tented both sides, 81 vias
v3: diameter 23.62, hole 7.87, Top Layer to Bottom Layer, 12 vias

## Nets (pads, with @x,y where several pads share a name; then routed paths per layer and width w, separated by ;. In a path a pad name is that pad's centre, name@x,y a point inside that pad or via, vN(x,y) a via of type N, cw(c..) or ccw(c..) an arc to the next point about the centre after c; other vN are vias at no path point)
1V8: R19.1 R28.2 U8.5 | length 2359.4
  Top Layer w14: R19.1@333.99,769.17 334.65,768.51 v2(334.65,303.15) ; v2(334.65,169.29) 366.14,137.8 v2(366.14,-59.06) ; U8.5@794.28,-680 v2(832,-680) 1015,-863 1197,-863 1227,-833 v2(1227,-717) R28.2@1160,-717
  Bottom Layer w14: v2(334.65,169.29) v2(334.65,303.15) ; v2(366.14,-59.06) 366.14,-191.14 832,-657 v2(832,-680)
5VCC: C2.2 C4.1 C5.1 C9.1 C21.2 L1.1 P2.1 P3.6 P4.2 pad.22@1202,1241 U2.3 U5.3 U10.8 | length 7480.4
  Top Layer w14: C9.1@314.96,1253.01 C9.1@315.81,1252.17 ; v2@402.41,1358.83 v2(405,1361.43)
  Top Layer w19.68: C21.2@-67.73,1316.26 C21.2@-60.76,1309.29 -60.76,1353.22 -52.56,1361.43 v2(405,1361.43) ; L1.1@1036.84,602.39 C2.2@1036.84,661.42 1036.84,780.93 1155.91,900 P2.1@1307,900
  Top Layer w20: U10.8@-201.86,1309.29 C21.2@-63.73,1309.29
  Top Layer w39.37: P3.6@-712.6,-1245.35 v2(-712.6,-1106.3) -712.6,-910.33 -285.63,-483.37 981.2,-483.37 v2(984.25,-480.32) ; v2@-284.16,-483.37 v2(-284.16,-481.89) ; U5.3@314.44,1123.21 314.72,1123.49 314.72,1251.98 314.9,1252.17 C9.1@315.81,1252.17 ; C9.1@314.96,1253.01 314.96,1303.15 370.64,1358.83 v2@402.41,1358.83 ; U2.3@805.45,1123.09 805.45,1242.81 805.26,1243 805,1243 805,1327 1052,1327 v1(1061,1318) 1125,1318 pad.22@1202,1241 1309,1134 1309,902 P2.1@1307,900
  Bottom Layer w19.68: P4.2@-913.39,-1162.99 -769.29,-1162.99 v2(-712.6,-1106.3) ; v1@1060,1327 1065,1332
  Bottom Layer w39.37: v2(405,1361.43) 412.09,1354.33 1059.54,1354.33 1072.43,1341.44 1072.43,1336.93 ; v2(984.25,-480.32) 1110.24,-354.33 1110.24,1294.48 1087.17,1317.54 1085.31,1317.54 1072.43,1330.43
  other v1: 1087,1358
5VCC_D: B1.8 B2.8 C8.2 C26.1 C27.1 C28.1 C29.1 L1.2 R16.1 R38.1 U1.7 U9.7 | length 4068
  Top Layer w14: v2(-688.98,224.41) C28.1@-644.26,224.41 C28.1@-643.7,223.85 ; C29.1@-551.18,-106.3 C29.1@-546.84,-110.64 ; v2(-551.18,-51.18) v2@-551.18,-47.51 ; -509.84,-194.88 -507.87,-192.91 ; R16.1@596.99,192.04 R16.1@598.43,190.61 ; U9.7@812.99,-215.55 859.25,-215.55 905.51,-169.29 C27.1@955.54,-169.29 C27.1@956.69,-168.14 ; C8.2@1103.77,538.3 C8.2@1104.89,539.37
  Top Layer w19.68: R38.1@-1021.12,-62.99 -565.12,-62.99 -553.31,-51.18 v2(-551.18,-51.18) C29.1@-551.18,-106.3 ; B1.8@-643.7,93.5 C28.1@-643.7,223.85 ; v2(-566.93,133.86) -566.93,-31.76 v2@-551.18,-47.51 ; C29.1@-546.84,-110.64 -509.84,-147.64 -509.84,-194.88 B2.8@-509.84,-284.45 ; R16.1@596.99,192.04 963.7,192.04 v2(1019.69,248.03) 1019.69,-3.94 956.69,-66.93 C27.1@956.69,-168.14 ; v2(598.43,133.86) R16.1@598.43,190.61 ; U1.7@946.85,327.76 1004.92,327.76 v2(1043.31,366.14) C26.1@1103.77,366.14 C8.2@1103.77,538.3 ; C8.2@1104.89,539.37 L1.2@1104.87,602.36
  Bottom Layer w19.68: v2(-688.98,224.41) -598.43,133.86 v2(-566.93,133.86) v2(598.43,133.86) ; v2(1019.69,248.03) 1019.69,342.52 v2(1043.31,366.14)
A0: B1.1 C10.2 C22.2 U1.6 U6.3 | length 2750.3
  Top Layer w14: v2(-1019.68,224.41) -1019.68,189.96 C22.2@-1020.29,189.36 -874.4,189.36 -812.99,127.95 B1.1@-812.99,93.5 ; v2(-3.94,181.1) 165.35,11.81 U6.3@251.97,11.81 ; v2(897.64,303.15) 898.13,302.66 946.36,302.66 U1.6@946.85,302.17 947.34,302.66 1103.28,302.66 C10.2@1103.77,303.15
  Bottom Layer w14: v2(-1019.68,224.41) -1016.04,224.41 -960.92,279.53 -921.26,279.53 -102.36,279.53 v2(-3.94,181.1) ; U6.3@251.97,11.81 724.41,11.81 897.64,185.04 v2(897.64,303.15)
AP_RST: R25.2 R31.2 U7.8 | length 2669.4
  Top Layer w11.81: v1(-1488,-129.69) -1488,-128 -1479.75,-119.75 -1443,-119.75 R31.2@-1443,-116.59 ; v2(211,-1139) 264.69,-1192.69 U7.8@316.89,-1192.69
  Top Layer w14: U7.8@316.89,-1192.69 405.31,-1192.69 417,-1181 R25.2@478,-1181
  Bottom Layer w11.81: v1(-1488,-129.69) -1374.33,-129.69 -1285,-219.02 -1285,-567 -1064.62,-787.38 -138.62,-787.38 211,-1137 v2(211,-1139)
B0: Q1.2 Q2.2 R20.2 R39.2 U6.2 | length 1977
  Top Layer w14: v2(-1059.06,-366.14) -1056.46,-363.55 -1056.46,-282.84 Q2.2@-1053.15,-279.53 -969.94,-279.53 R39.2@-968.5,-280.96 ; v2(-448.82,-401.57) -295.28,-401.57 -147.64,-253.94 U6.2@-13.78,-253.94 55.12,-185.04 R20.2@438.44,-185.04 440.94,-182.54 Q1.2@440.94,-47.24
  Bottom Layer w14: v2(-1059.06,-366.14) -948.82,-476.38 -523.62,-476.38 v2(-448.82,-401.57)
BLUE_I: R13.1 U7.30 | length 1669.6
  Top Layer w12: R13.1@-1403.41,-203 -1397.41,-209 -1391.41,-203 v1(-1343,-203) ; v2(-639,-929) -425.31,-1142.69 U7.30@-352.4,-1142.69
  Bottom Layer w12: v1(-1343,-203) -1343,-204 -1313.97,-233.02 -1313.97,-615.16 -1000.13,-929 v2(-639,-929)
C0: Q1.1 Q2.1 R5.2 R33.2 U6.1 | length 2673.7
  Top Layer w14: v2(-1156.39,-279.53) Q2.1@-1127.95,-279.53 ; R33.2@-1020.31,126.37 -1020.12,126.18 -980.51,126.18 v2(-980.32,125.98) ; U6.1@-279.53,11.81 -169.29,122.05 -55.12,236.22 v2(444.88,236.22) 444.88,31.5 Q1.1@440.94,27.56 ; v2(594.49,437.01) 594.49,396.2 R5.2@596.99,393.7
  Bottom Layer w14: v2(-1156.39,-279.53) -1156.39,-50.09 v2(-980.32,125.98) -953.85,99.52 -367.24,99.52 U6.1@-279.53,11.81 ; v2(444.88,236.22) 444.88,362.2 519.69,437.01 v2(594.49,437.01)
CCS811_ON: U7.11
EN: C16.2 R23.2 R26.2 U7.3 | length 2071.8
  Top Layer w12: R26.2@-1046,-716 -1044,-718 -1044,-773 -1006,-811 v1(-988.46,-811) ; v2(261,-1445) 262.16,-1443.84 315.73,-1443.84 U7.3@316.89,-1442.69
  Top Layer w14: U7.3@316.89,-1442.69 373.31,-1442.69 446.7,-1369.3 472.7,-1369.3 479,-1363 C16.2@537,-1363
  Bottom Layer w12: v1(-988.46,-811) -167,-811 231,-1209 231,-1413 261,-1443 v2(261,-1445)
  other v3: -14.8,-1320.64 58.03,-1320.64 -51.22,-1284.22 21.61,-1284.22 94.45,-1284.22 -14.8,-1247.8 58.03,-1247.8 -51.22,-1211.39 21.61,-1211.39 94.45,-1211.39 -14.8,-1174.97 58.03,-1174.97
EN_F: C17.2 P3.2 R26.1 S1.1 | length 1051.5
  Top Layer w12: S1.1@-1214.29,-631 -1165.53,-631 C17.2@-1132.59,-663.94 ; R26.1@-1117,-716 -1117,-753.08 -830.71,-1039.37 -830.71,-1327.17 P3.2@-711.42,-1446.46 ; C17.2@-1117,-660 -1113,-664 R26.1@-1113,-716
GND: U7.1